# EAGLE board HW3_Board (EAGLE 9.3.0)
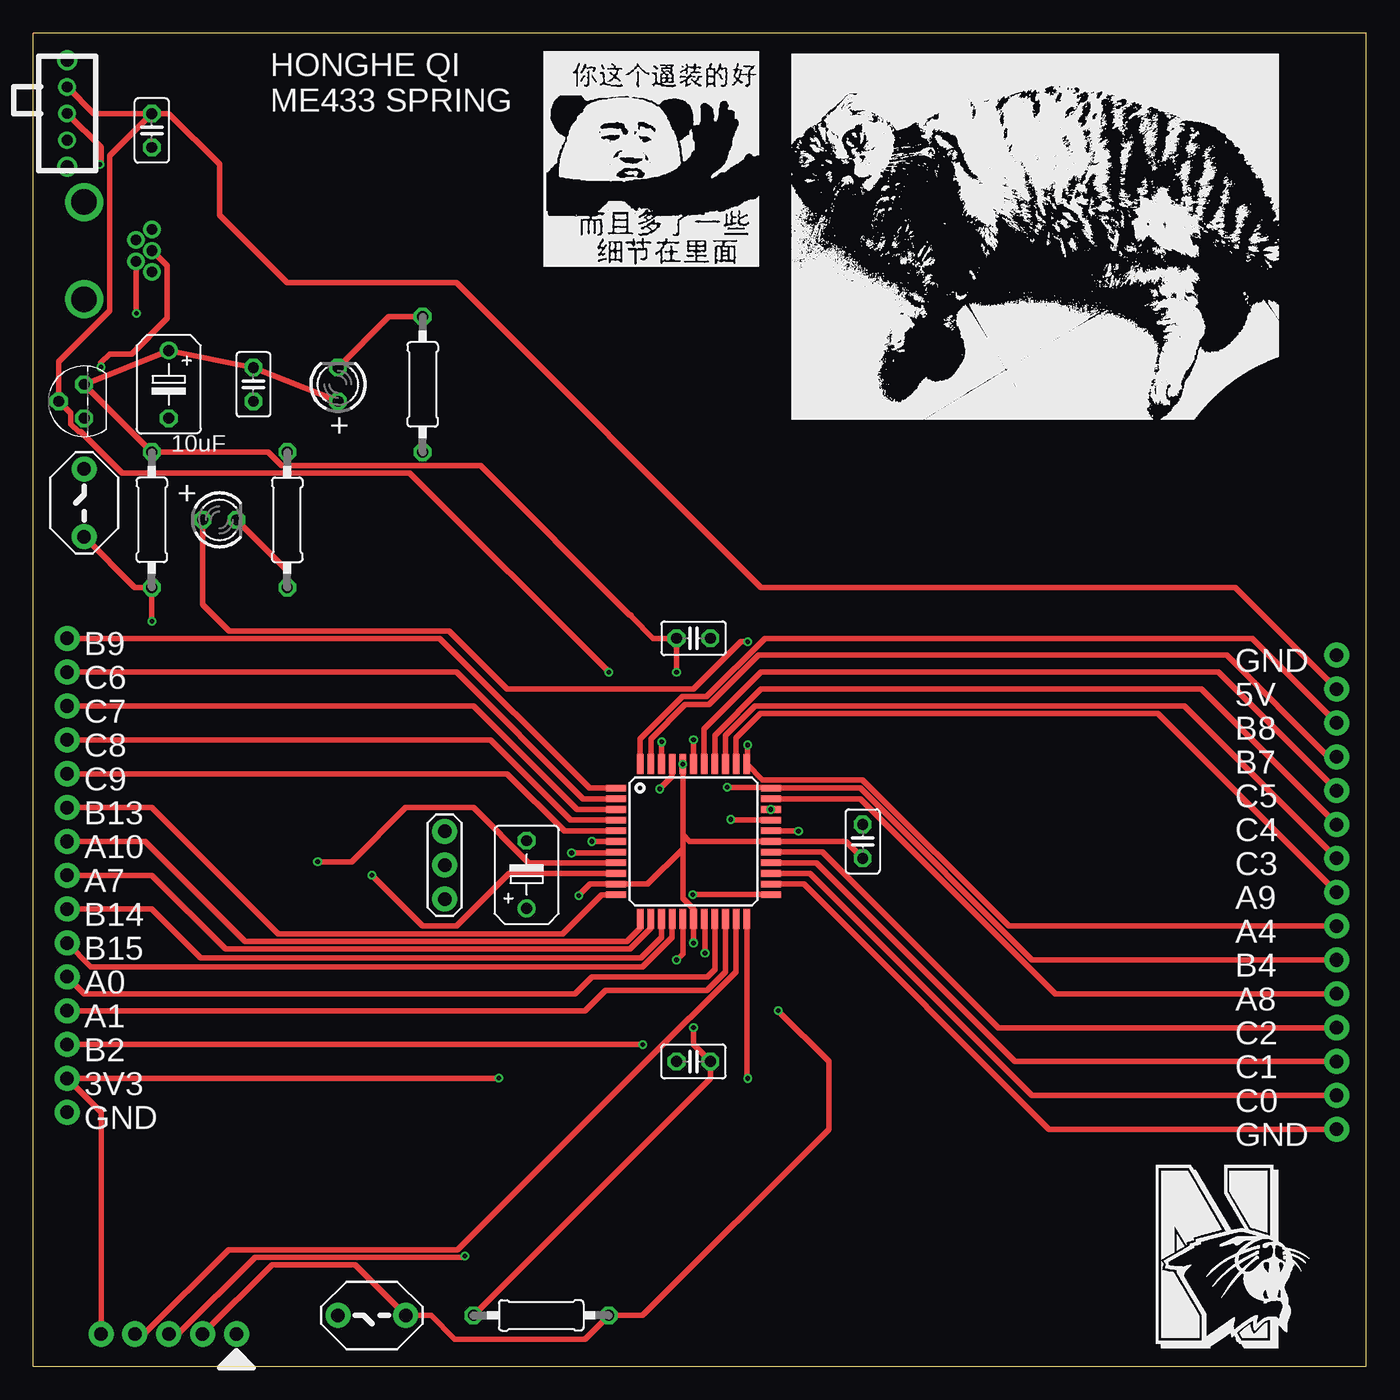
[diagram p0: board, top side]
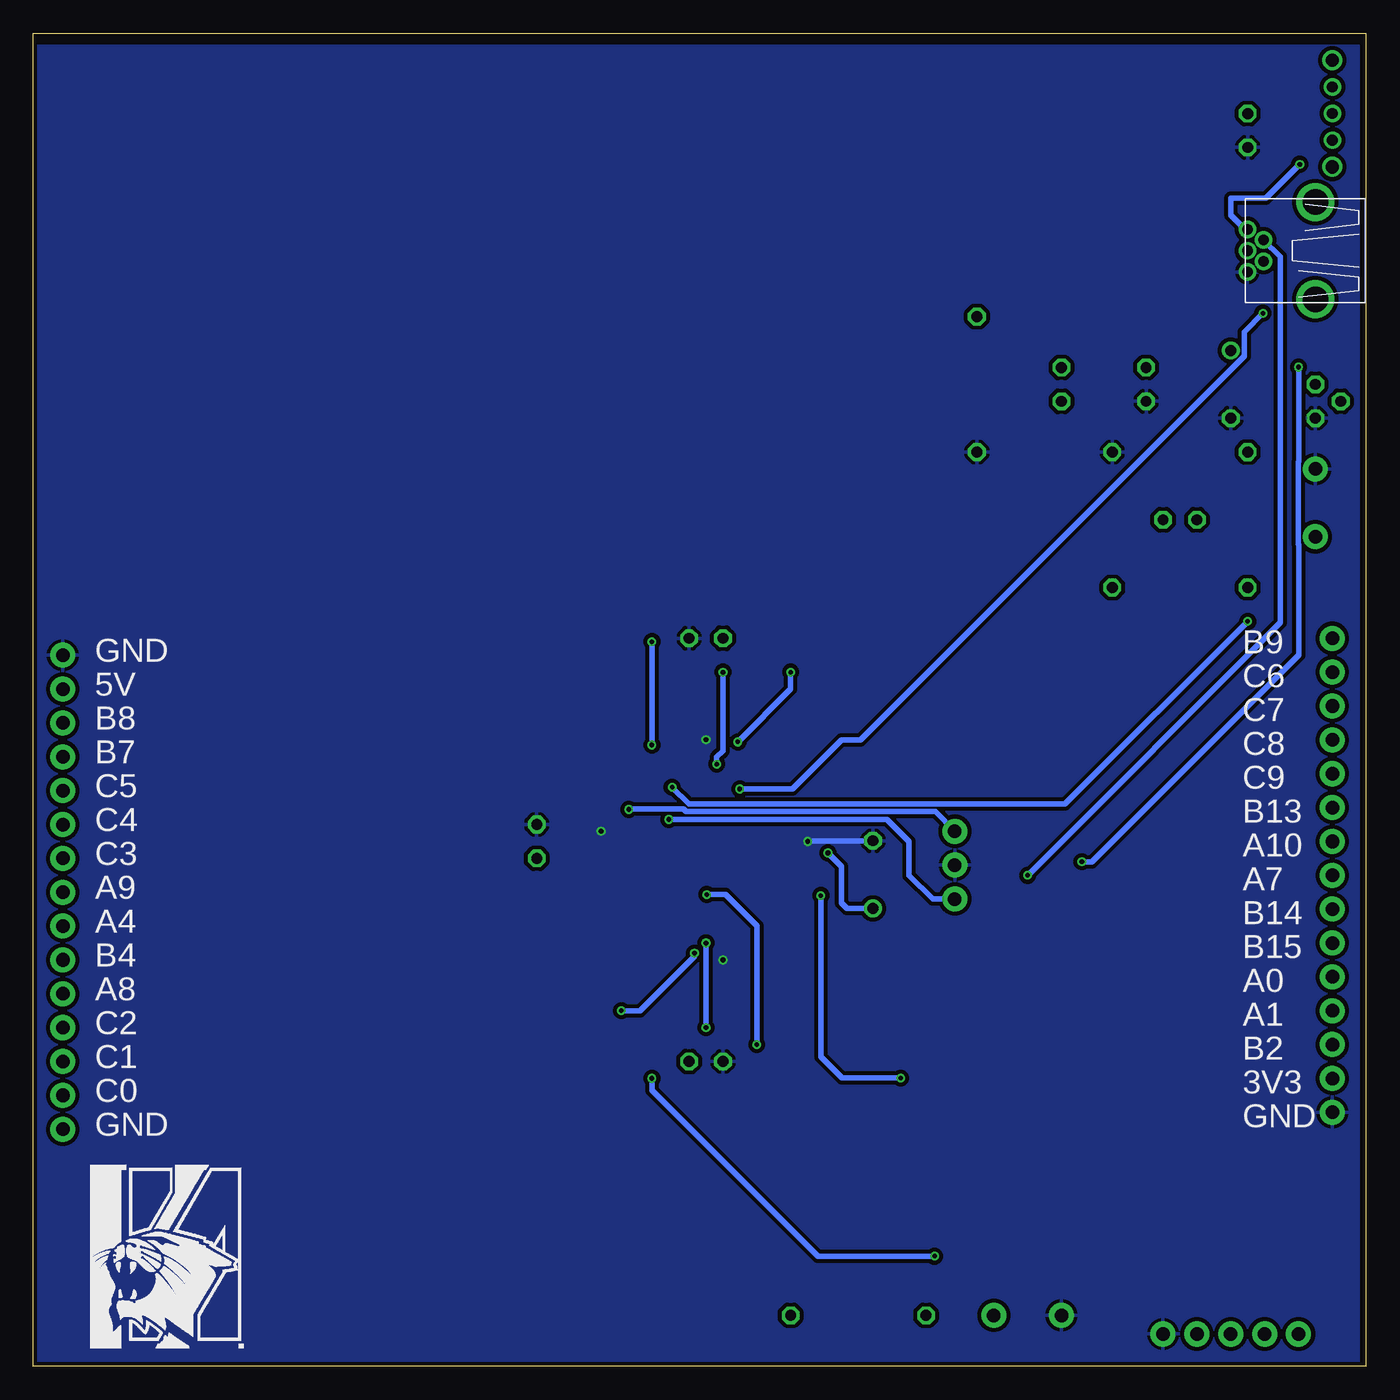
[diagram p1: board, bottom side, seen from below]

Size 100 x 100 mm. Coordinates in mm from the lower left corner, seen from the top.
Outline: 0,0 100,0 100,100 0,100 0,0
Copper layers (1*16): Top 0.035mm / dielectric 1.5mm / Bottom 0.035mm
Design rules "SeeedStudio_2layer_DRU_no_angle_20140221": minimum track width 6mil, minimum drill 12mil, track to track 6mil, track to pad 6mil, pad to pad 6mil, via to via 6mil, smd to smd 0mil, copper to edge 10mil, drill to drill 10mil, minimum pad ring 10mil, minimum via ring 6mil, stop-mask expansion 2mil, vias tented up to drill 100mil, thermal gap 10mil

## Footprints (pad centres in the part's own frame; a part is rotated, then mirrored left to right if it is on the bottom)
C025-025X050 = drill 0.813 octagon: 1 -1.27,0; 2 1.27,0
B45181B = drill 0.813: + -2.54,0 | drill 0.813 octagon: - 2.54,0
USB-MB-H = drill 0.8: D+ 5.1,0; D- 3.9,0.8; GND 5.1,-1.6; ID 3.9,-0.8; VBUS 5.1,1.6 | drill 1.9: P$6 0,-3.65; P$7 0,3.65
LED3MM = drill 0.813 octagon: A -1.27,0; K 1.27,0
0207/10 = drill 0.813 octagon: 1 -5.08,0; 2 5.08,0
TQFP44 = smd 1.5 x 0.5: 1 -5.8,4; 2 -5.8,3.2; 3 -5.8,2.4; 4 -5.8,1.6; 5 -5.8,0.8; 6 -5.8,0; 7 -5.8,-0.8; 8 -5.8,-1.6; 9 -5.8,-2.4; 10 -5.8,-3.2; 11 -5.8,-4; 23 5.8,-4; 24 5.8,-3.2; 25 5.8,-2.4; 26 5.8,-1.6; 27 5.8,-0.8; 28 5.8,0; 29 5.8,0.8; 30 5.8,1.6; 31 5.8,2.4; 32 5.8,3.2; 33 5.8,4 | smd 0.5 x 1.5: 12 -4,-5.8; 13 -3.2,-5.8; 14 -2.4,-5.8; 15 -1.6,-5.8; 16 -0.8,-5.8; 17 0,-5.8; 18 0.8,-5.8; 19 1.6,-5.8; 20 2.4,-5.8; 21 3.2,-5.8; 22 4,-5.8; 34 4,5.8; 35 3.2,5.8; 36 2.4,5.8; 37 1.6,5.8; 38 0.8,5.8; 39 0,5.8; 40 -0.8,5.8; 41 -1.6,5.8; 42 -2.4,5.8; 43 -3.2,5.8; 44 -4,5.8
SLIDE_SWITCH = drill 0.8: 1 -2,0; 2 0,0; 3 2,0 | drill 1: P$3 -4,0; P$4 4,0
TO92 = drill 0.813 octagon: 1 -1.27,0; 2 0,1.905; 3 1.27,0
PUSHBUTTON = drill 1.016 pad 1.88: 1 -2.54,0; 2 2.54,0
1X15 = drill 1.016 pad 1.88: 1 -15.24,0; 2 -12.7,0; 3 -10.16,0; 4 -7.62,0; 5 -5.08,0; 6 -2.54,0; 7 0,0; 8 2.54,0; 9 5.08,0; 10 7.62,0; 11 10.16,0; 12 12.7,0; 13 15.24,0; 14 17.78,0; 15 20.32,0
1X05 = drill 1.016 pad 1.88: 1 0,0; 2 2.54,0; 3 5.08,0; 4 7.62,0; 5 10.16,0
OSC = drill 1.016 pad 1.88: 1 -2.54,0; 2 0,0; 3 2.54,0

## Placement (x,y rotation side)
C1  0.1uF  [C025-025X050]  62.23,39.37 90 top
C3  0.1uF  [C025-025X050]  49.53,54.61 0 top
C4  0.1uF  [C025-025X050]  8.89,92.71 270 top
C5  0.1uF  [C025-025X050]  16.51,73.66 270 top
C6  10uF  [B45181B]  37.01,36.88 90 top
C7  10uF  [B45181B]  10.16,73.66 270 top
C8  0.1uF  [C025-025X050]  49.53,22.86 180 top
J1  USB-MB-H  [USB-MB-H]  3.81,83.69 0 top
LED1  RED  [LED3MM]  22.86,73.66 90 top
LED2  GREEN  [LED3MM]  13.97,63.5 0 top
R1  330  [0207/10]  29.21,73.66 90 top
R2  330  [0207/10]  19.05,63.5 270 top
R3  10k  [0207/10]  38.1,3.81 180 top
R4  10k  [0207/10]  8.89,63.5 90 top
U$1  PIC32MX270F256D  [TQFP44]  49.53,39.37 0 top
U$2  SLIDE_SWITCH  [SLIDE_SWITCH]  2.54,93.98 90 top
U$3  MCP1702  [TO92]  3.81,72.39 90 top
U$4  RESET  [PUSHBUTTON]  25.4,3.81 180 top
U$5  USER  [PUSHBUTTON]  3.81,64.77 90 top
U$6  CONN_015  [1X15]  2.54,34.29 90 top
U$7  CONN_015  [1X15]  97.79,38.1 270 top
U$8  PICKKIT  [1X05]  15.24,2.41 180 top
U$9  8MHZ  [OSC]  30.86,37.59 90 top

## Library data of the parts
C1 C3-C8 = rcl; SPICEPREFIX: C
J1 U$1-U$9 = Honghe_Qi_ME433_HW2_Library
LED1 LED2 = led
R1-R4 = rcl; SPICEPREFIX: R

## Nets
+3V3: C1.1 C3.1 C5.1 C7.+ C8.1 LED1.A R3.2 R4.2 U$1.10 U$1.17 U$1.28 U$1.40 U$3.3 U$6.2 U$8.5
+5V: C4.1 U$1.42 U$2.3 U$3.2 U$7.2
A2: U$1.30 U$9.1
A3: U$1.31 U$9.3
D+: J1.D+ U$1.8
D-: J1.D- U$1.9
GND: C1.2 C3.2 C4.2 C5.2 C6.- C7.- C8.2 J1.GND R1.1 R2.1 U$1.6 U$1.16 U$1.29 U$1.39 U$3.1 U$4.2 U$5.2 U$6.1 U$7.1 U$8.1 U$9.2
ID: J1.ID U$1.41
MCLR: R3.1 U$1.18 U$4.1 U$8.2
N$1: J1.VBUS U$2.2
N$2: LED1.K R1.2
N$3: LED2.K R2.2
N$4: C6.+ U$1.7
PGC: U$1.22 U$8.3
PGD: U$1.21 U$8.4
RA0: U$1.19 U$6.5
RA1: U$1.20 U$6.4
RA4/LED: LED2.A U$1.34 U$7.9
RA7: U$1.13 U$6.8
RA8: U$1.32 U$7.11
RA9: U$1.35 U$7.8
RA10: U$1.12 U$6.9
RB2: U$1.23 U$6.3
RB3: U$1.24 U$7.15
RB7: U$1.43 U$7.4
RB8: U$1.44 U$7.3
RB9: U$1.1 U$6.15
RB13: U$1.11 U$6.10
RB14: U$1.14 U$6.7
RB15: U$1.15 U$6.6
RC0: U$1.25 U$7.14
RC1: U$1.26 U$7.13
RC2: U$1.27 U$7.12
RC3: U$1.36 U$7.7
RC4: U$1.37 U$7.6
RC5: U$1.38 U$7.5
RC6: U$1.2 U$6.14
RC7: U$1.3 U$6.13
RC8: U$1.4 U$6.12
RC9: U$1.5 U$6.11
USER/RB4: R4.1 U$1.33 U$5.1 U$7.10

## Tracks (layer width: path | path; a pad name or v marks a point on that pad's centre or on a via)
+3V3  (via drill 0.35)
  Top 0.406: LED1.A C5.1 C7.+ U$3.3 R4.2 17.61,68.58 18.63,67.56 33.56,67.56 44.75,56.37 44.84,56.34 44.91,56.21 46.51,54.61 C3.1 v48.26,52.07 | v49.53,25.4 49.53,24.13 C8.1 50.8,21.59 R3.2 | U$8.5 5.08,19.05 U$6.2 34.9,21.59 v34.92,21.61 | 48.73,38.82 48.73,35.09 49.53,34.29 U$1.17 v49.53,31.75 | 48.73,39.88 48.73,38.82 | 48.73,38.82 46.08,36.17 U$1.10 41.78,36.17 v40.92,35.31 | C1.1 60.96,39.37 U$1.28 49.24,39.37 48.73,39.88 | U$1.40 48.73,39.88
  Bottom 0.406: v49.53,25.4 v49.53,31.75 | v48.26,52.07 48.26,46.17 48.73,45.7 U$1.40 | v34.92,21.61 39.32,21.61 40.92,23.22 v40.92,35.31
  other vias: 48.73,45.17
+5V  (via drill 0.35)
  Top 0.406: U$7.2 90.17,58.42 54.61,58.42 31.75,81.28 19.05,81.28 13.97,86.36 13.97,90.17 10.16,93.98 C4.1 | U$1.42 47.13,46.83 v47.14,46.84 | v43.18,52.07 28.25,67 6.66,67 3.56,70.1 3.39,70.1 2.79,70.7 2.79,71.5 U$3.2 1.91,75.37 5.72,79.18 5.72,90.81 C4.1 | U$2.3 4.54,93.98 C4.1
  Bottom 0.406: v47.14,46.84 43.18,50.8 v43.18,52.07
A2  (via drill 0.35)
  Top 0.406: U$1.30 52.38,40.97 v52.32,41.02
  Bottom 0.406: U$9.1 32.51,35.05 34.29,36.83 34.29,39.37 35.94,41.02 v52.32,41.02
A3  (via drill 0.35)
  Bottom 0.406: U$9.3 32.33,41.6 51.03,41.6 51.22,41.79 55.31,41.79 U$1.31
  other vias: 55.33,41.77
D+  (via drill 0.35)
  Top 0.406: v5.07,74.95 5.07,75.3 5.71,75.95 7.37,75.95 10.05,78.63 10.05,82.55 10.05,82.56 J1.D+ | v21.34,37.85 23.88,37.85 27.94,41.91 33.02,41.91 37.16,37.77 U$1.8
  Bottom 0.406: v5.07,74.95 5.07,67.88 5.11,67.85 5.11,61.69 5.07,61.66 5.07,53.35 20.57,37.85 v21.34,37.85
D-  (via drill 0.35)
  Top 0.406: U$1.9 38.18,36.97 35.7,36.97 31.75,33.02 29.21,33.02 v25.4,36.83
  Bottom 0.406: v25.4,36.83 6.45,55.78 6.45,83.23 J1.D-
GND  (via drill 0.35)
  Top 0.406: v41.91,39.37 U$1.6 | U$1.16 48.73,30.95 v48.26,30.48 | U$1.39 v49.53,46.99 | 55.88,40.19 55.86,40.17 U$1.29 57.37,40.17 v57.4,40.13
  Bottom 0.406: v41.91,39.37 41.86,39.42 C6.-
  pour Bottom (isolate 0.305): 1.27,99.06 99.69,99.06 99.69,0.25 0.51,0.25 0.51,99.06
ID  (via drill 0.35)
  Top 0.406: v7.75,78.99 7.71,79.03 J1.ID | v46.99,43.31 47.93,44.25 U$1.41
  Bottom 0.406: v7.75,78.99 9.14,77.6 9.14,75.78 37.93,46.99 39.37,46.99 43.05,43.31 v46.99,43.31
MCLR  (via drill 0.35)
  Top 0.406: U$8.2 17.91,7.62 24.13,7.62 U$4.1 29.84,3.81 31.62,2.03 41.4,2.03 R3.1 45.72,3.81 59.69,17.78 59.69,22.86 v55.88,26.67 | v50.4,30.99 50.4,33.5 U$1.18
  Bottom 0.406: v55.88,26.67 54.48,26.67 50.4,30.76 v50.4,30.99
N$1  (via drill 0.35)
  Top 0.406: v4.98,90.17 5.08,90.17 5.08,91.44 U$2.2
  Bottom 0.406: v4.98,90.17 7.52,87.63 10.16,87.63 10.16,86.36 9.09,85.29 J1.VBUS
N$2
  Top 0.406: LED1.K 26.67,78.74 R1.2
N$3
  Top 0.406: LED2.K 19.05,59.69 R2.2
N$4  (via drill 0.35)
  Top 0.406: U$1.7 43.2,38.57 43.13,38.5 v40.39,38.5
  Bottom 0.406: C6.+ 38.97,34.34 39.37,34.74 39.37,37.49 v40.39,38.5
PGC  (via drill 0.35)
  Top 0.406: U$8.3 10.87,2.41 16.63,8.18 32.31,8.18 v32.38,8.26 | U$1.22 53.53,21.65 v53.59,21.59
  Bottom 0.406: v32.38,8.26 41.15,8.26 53.59,20.7 v53.59,21.59
PGD
  Top 0.406: U$8.4 8.33,2.41 14.65,8.74 31.83,8.74 49.23,26.13 49.28,26.13 52.73,29.59 U$1.21
RA0
  Top 0.406: U$6.5 3.81,27.94 40.64,27.94 41.91,29.21 50.57,29.21 51.13,29.77 U$1.19
RA1
  Top 0.406: U$6.4 41.4,26.67 42.93,28.19 50.55,28.19 51.94,29.59 51.94,33.56 U$1.20
RA4/LED  (via drill 0.35)
  Top 0.406: U$7.9 73.18,33.02 62.21,43.99 54.71,43.99 U$1.34 53.59,45.23 v53.59,46.61 | LED2.A 12.7,57.15 14.68,55.17 31.19,55.17 35.56,50.8 49.53,50.8 53.09,54.36 v53.59,54.36
  Bottom 0.406: v53.59,54.36 v53.59,46.61
RA7
  Top 0.406: U$6.8 8.89,36.83 14.41,31.31 44.77,31.31 46.33,32.87 U$1.13
RA8
  Top 0.406: U$1.32 62.05,42.57 76.68,27.94 U$7.11
RA9
  Top 0.406: U$1.35 52.73,47.14 54.56,48.97 84.38,48.97 U$7.8
RA10
  Top 0.406: U$1.12 45.53,32.86 44.55,31.88 15.88,31.88 8.38,39.37 U$6.9
RB2  (via drill 0.35)
  Top 0.406: U$6.3 v45.72,24.13 | v49.48,35.38 U$1.23
  Bottom 0.406: v45.72,24.13 45.72,33.02 48.08,35.38 v49.48,35.38
RB3
  Top 0.406: U$1.24 57.81,36.17 76.2,17.78 U$7.15
RB7
  Top 0.406: U$7.4 97.16,45.72 89.53,53.34 54.41,53.34 50.71,49.64 48.91,49.64 46.33,47.06 U$1.43
RB8
  Top 0.406: U$1.44 45.53,47.05 48.72,50.24 50.52,50.24 54.89,54.61 91.44,54.61 U$7.3
RB9
  Top 0.406: U$1.1 41.72,43.37 30.48,54.61 U$6.15
RB13
  Top 0.406: U$6.10 8.89,41.91 18.36,32.44 39.7,32.44 42.63,35.37 U$1.11
RB14
  Top 0.406: U$1.14 47.13,32.17 45.58,30.62 12.56,30.62 8.89,34.29 U$6.7
RB15
  Top 0.406: U$6.6 4.32,29.97 45.72,29.97 47.93,32.18 U$1.15
RC0
  Top 0.406: U$1.25 58.28,36.97 74.93,20.32 U$7.14
RC1
  Top 0.406: U$1.26 58.75,37.77 73.66,22.86 U$7.13
RC2
  Top 0.406: U$1.27 59.22,38.57 72.39,25.4 U$7.12
RC3
  Top 0.406: U$7.7 86.36,49.53 54.13,49.53 51.93,47.33 U$1.36
RC4
  Top 0.406: U$1.37 51.13,47.32 54.61,50.8 87.63,50.8 U$7.6
RC5
  Top 0.406: U$7.5 88.9,52.07 54.61,52.07 50.33,47.79 U$1.38
RC6
  Top 0.406: U$6.14 31.75,52.07 41.25,42.57 U$1.2
RC7
  Top 0.406: U$1.3 40.78,41.77 33.02,49.53 U$6.13
RC8
  Top 0.406: U$6.12 34.29,46.99 40.31,40.97 U$1.4
RC9
  Top 0.406: U$1.5 39.84,40.17 35.56,44.45 U$6.11
USER/RB4  (via drill 0.35)
  Top 0.406: U$7.10 74.93,30.48 62.04,43.37 U$1.33 55.27,43.43 v52.07,43.43 | U$5.1 7.62,58.42 R4.1 v8.89,55.88
  Bottom 0.406: v8.89,55.88 22.61,42.16 50.8,42.16 v52.07,43.43

## Text on the board
tPlace: HONGHE QI / ME433 SPRING | + | 10uF | + | B9 | GND | C6 | 5V | C7 | B8 | C8 | B7 | C9 | C5 | B13 | C4 | A10 | C3 | A7 | A9 | B14 | A4 | B15 | B4 | A0 | A8 | A1 | C2 | B2 | C1 | 3V3 | C0 | GND | GND
bPlace: B9 | GND | C6 | 5V | C7 | B8 | C8 | B7 | C9 | C5 | B13 | C4 | A10 | C3 | A7 | A9 | B14 | A4 | B15 | B4 | A0 | A8 | A1 | C2 | B2 | C1 | 3V3 | C0 | GND | GND